# Altium PCB PCB_2.PcbDoc
Units mm, origin at the board's own origin, x right, y up, seen from the top; angles counter-clockwise.
Board outline 33.1 x 39.88 mm, 2 copper layers (Top Layer, Bottom Layer); 74 components, 65 nets, 291 pads, 28 vias.
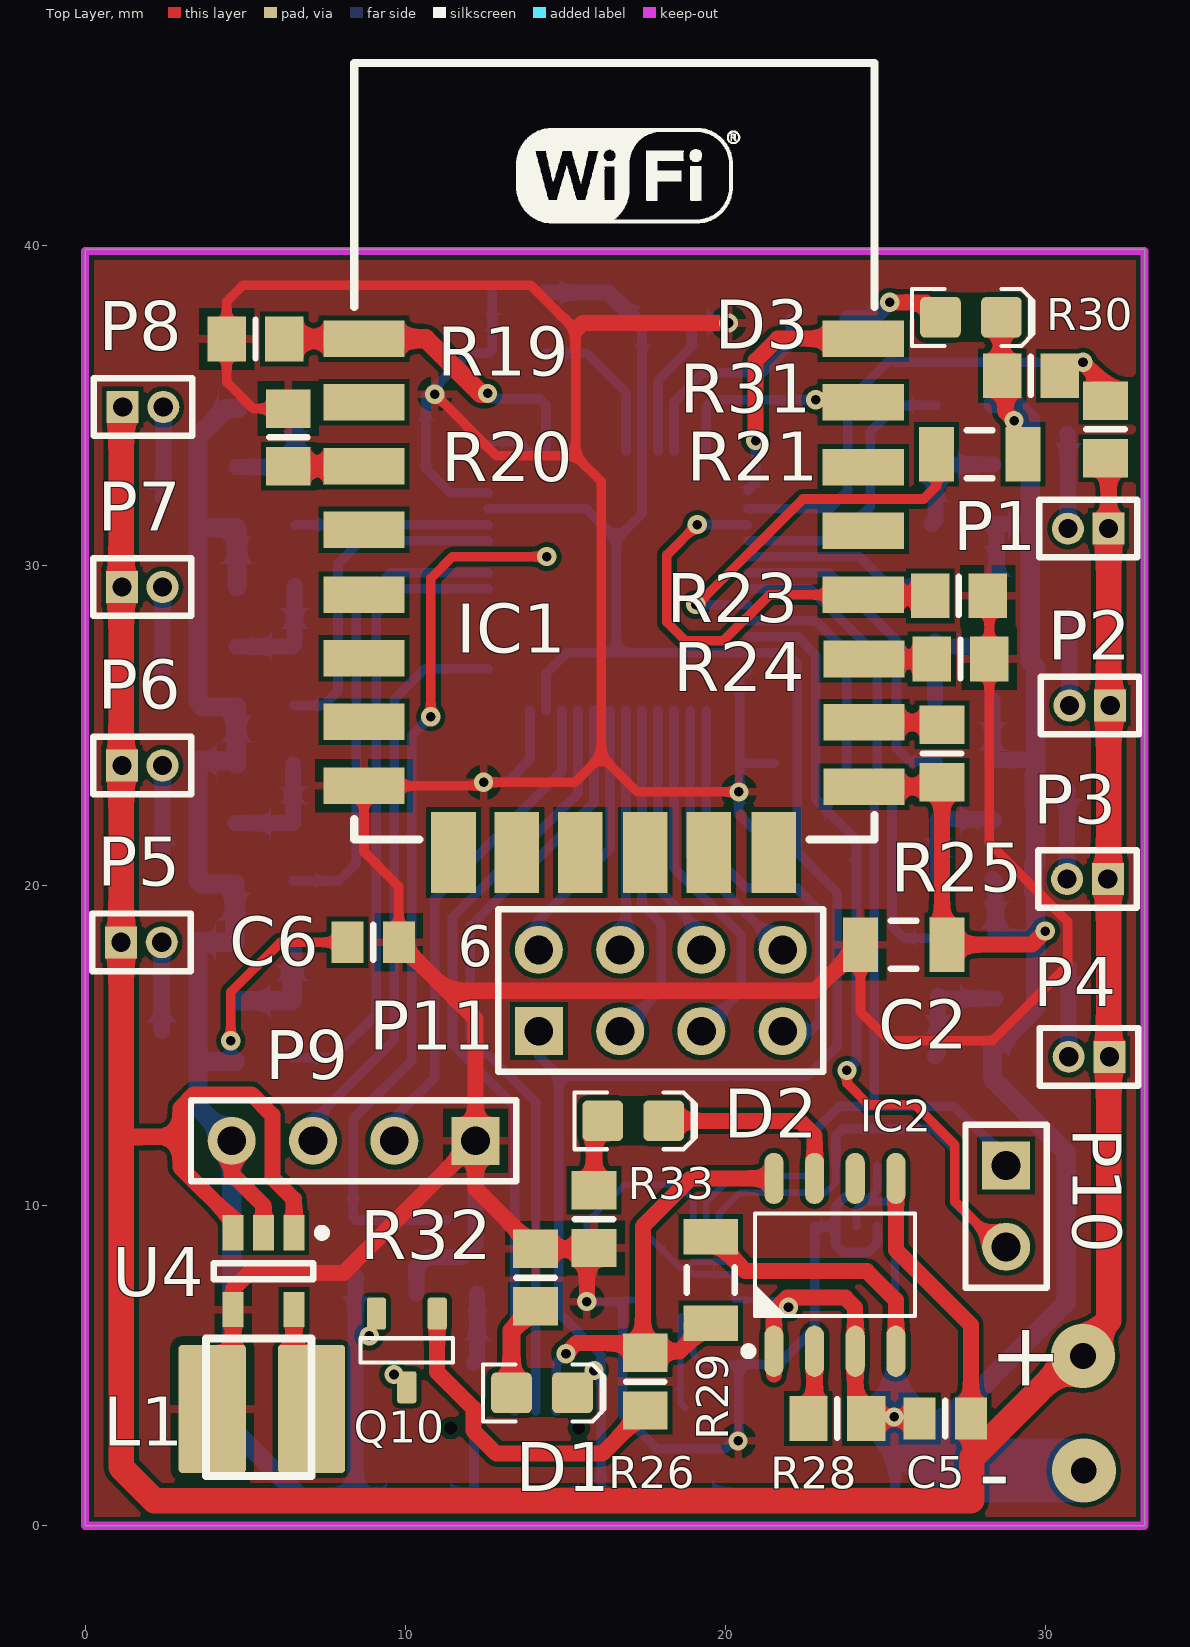
[diagram p0: Top Layer view]
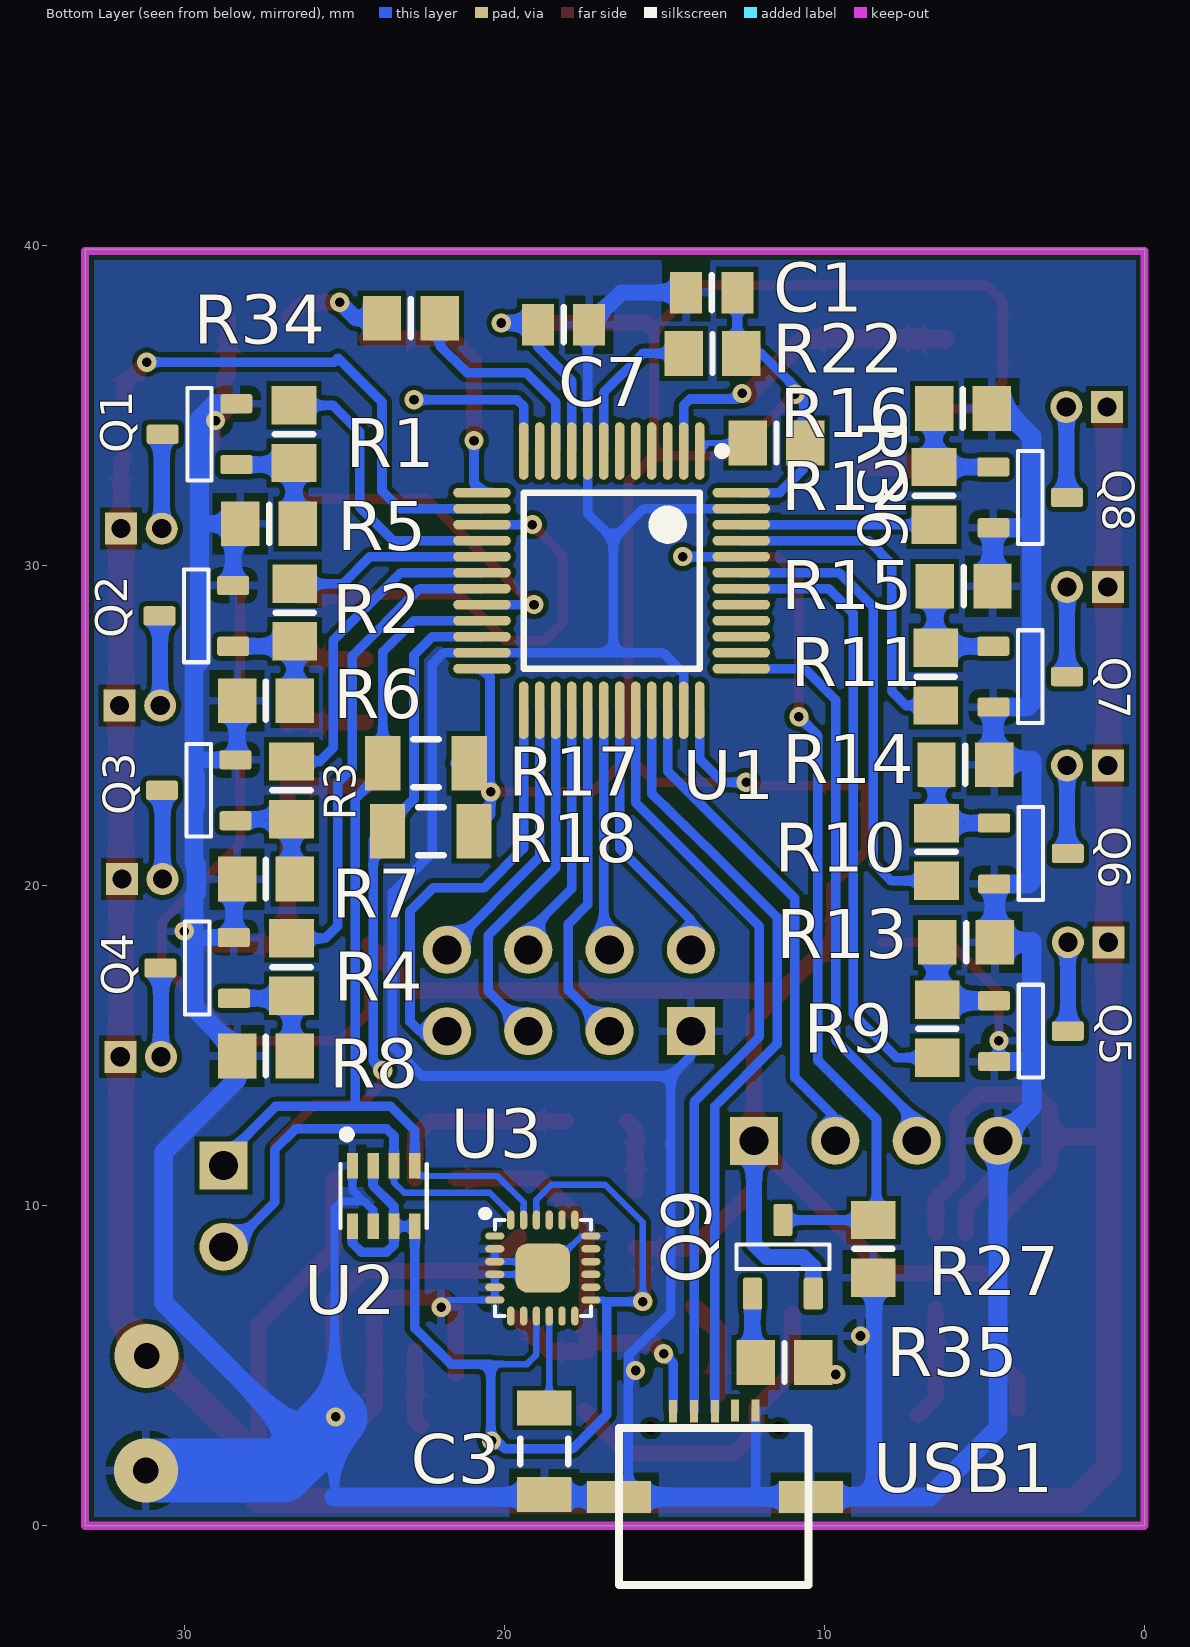
[diagram p1: Bottom Layer view, seen from below]

## Layer stack, top to bottom
Top Solder: solder mask 0.0102, Solder Resist, Dk 3.5
Top Layer: signal copper 0.0356
Dielectric 1: dielectric 0.32, FR-4, Dk 4.8
Bottom Layer: signal copper 0.0356
Bottom Solder: solder mask 0.0102, Solder Resist, Dk 3.5

## Board outline
0,0 33.1,0 33.1,39.875 0,39.875

## Design rules (kind name [scope] priority, off if disabled: settings)
Clearance [All] p1: gap=0.15
PolygonConnect [All] p1: connectstyle=Relief reliefconductorwidth=0.254 reliefentries=4 polygonreliefangle="90 Angle" airgapwidth=0.254
RoutingVias [All] p1: holewidth=0.711 width=1.27 viastyle="Through Hole" minholewidth=0.711 minwidth=1.27 maxholewidth=0.711 maxwidth=1.27
SolderMaskExpansion [All] p1: expansion=0.102
Width [All] p1: maxlimit=2 minlimit=0.2 preferedwidth=0.5
30 further rules are at their usual default settings.

## Classes and differential pairs
component class Potencia: C5 C6 C7 C? D1 D2 D3 IC2 L1 P1 P2 P3 P4 P5 P6 P7 P8 P? Q1 Q2 Q3 Q4 Q5 Q6 Q7 Q8 Q? R1 R2 R3 R4 R5 R6 R7 R8 R9 R10 R11 R12 R13 R14 R15 R16 R28 R29 R32 R33 R34 R? U4
component class Esquematico: C1 C2 C3 C? IC1 P9 P10 P11 Q9 Q10 R17 R18 R19 R20 R21 R22 R23 R24 R25 R26 R27 R30 R31 R35 R36 R? U1 U2 U3 U? USB1

## Components (designator, comment, footprint, x,y, rotation, side; value= is the part's Value field where it differs from the comment)
C1 "Cap" 6-0805_L 13.525,38.525 r180 bottom
C2 "Cap" C1206 25.575,18.15 r180 top
C3 "Cap" C1206 18.75,2.325 r90 bottom
C5 "Cap" 6-0805_L 26.875,3.35 r0 top
C6 "Cap" 6-0805_L 9,18.225 r0 top
C7 "Cap" 6-0805_L 18.15,37.525 r0 bottom
D1 "Diode" LED-0805 14.275,4.15 r0 top
D2 "Diode" LED-0805 17.125,12.65 r0 top
D3 "Diode" LED-0805 27.675,37.75 r0 top
IC1 "ESP8266 ESP-12-E" "ESP8266 ESP-12-E B" 25.3,20.675 r0 top
IC2 "TP4056" SOIC127P600X175-8AN 23.425,8.15 r90 top
L1 "Inductor Iron Dot" "Inductor CD43" 8.075,1.65 r90 top
P1 "MHDR1X2" MHDR1X2 31.975,31.15 r180 top
P2 "MHDR1X2" MHDR1X2 32.025,25.625 r180 top
P3 "MHDR1X2" MHDR1X2 31.95,20.2 r180 top
P4 "MHDR1X2" MHDR1X2 32,14.65 r180 top
P5 "MHDR1X2" MHDR1X2 1.125,18.225 r0 top
P6 "MHDR1X2" MHDR1X2 1.15,23.75 r0 top
P7 "MHDR1X2" MHDR1X2 1.15,29.325 r0 top
P8 "MHDR1X2" MHDR1X2 1.175,34.95 r0 top
P9 "Header 4" HDR1X4 12.2,12.025 r180 top
P10 "Header 2" HDR1X2 28.775,11.25 r270 top
P11 "Header 4X2A" HDR2X4_CEN 14.175,15.45 r0 top
Q1 "AO3406" SOT23-3 29.525,34.1 r0 bottom
Q2 "AO3406" SOT23-3 29.625,28.425 r0 bottom
Q3 "AO3406" SOT23-3 29.55,22.975 r0 bottom
Q4 "AO3406" SOT23-3 29.6,17.425 r0 bottom
Q5 "AO3406" SOT23-3 3.55,15.45 r180 bottom
Q6 "AO3406" SOT23-3 3.55,21 r180 bottom
Q7 "AO3406" SOT23-3 3.575,26.525 r180 bottom
Q8 "AO3406" SOT23-3 3.575,32.125 r180 bottom
Q9 "S8055" SOT23-3 11.3,8.4 r90 bottom
Q10 "S8050" SOT23-3 10.05,5.475 r270 top
R1 "Res3" 6-0805_N 26.575,34.1 r90 bottom
R2 "Res3" 6-0805_N 26.55,28.525 r90 bottom
R3 "Res3" 6-0805_N 26.65,22.975 r90 bottom
R4 "Res3" 6-0805_N 26.65,17.45 r90 bottom
R5 "Res3" 6-0805_N 27.35,31.3 r180 bottom
R6 "Res3" 6-0805_N 27.45,25.775 r180 bottom
R7 "Res3" 6-0805_N 27.45,20.2 r180 bottom
R8 "Res3" 6-0805_N 27.45,14.675 r180 bottom
R9 "Res3" 6-0805_N 6.475,15.525 r270 bottom
R10 "Res3" 6-0805_N 6.5,21.05 r270 bottom
R11 "Res3" 6-0805_N 6.525,26.525 r270 bottom
R12 "Res3" 6-0805_N 6.575,32.175 r270 bottom
R13 "Res3" 6-0805_N 5.575,18.225 r0 bottom
R14 "Res3" 6-0805_N 5.6,23.775 r0 bottom
R15 "Res3" 6-0805_N 5.65,29.35 r0 bottom
R16 "Res3" 6-0805_N 5.675,34.9 r0 bottom
R17 "Res3" C1206 22.45,23.825 r0 bottom
R18 "Res3" C1206 22.3,21.7 r0 bottom
R19 "Res3" 6-0805_N 5.325,37.075 r180 top
R20 "Res3" 6-0805_N 6.35,34 r90 top
R21 "Res3" C1206 27.95,33.475 r0 top
R22 "Res3" 6-0805_N 13.5,36.625 r180 bottom
R23 "Res3" 6-0805_N 27.3,29.05 r0 top
R24 "Res3" 6-0805_N 27.35,27.075 r180 top
R25 "Res3" 6-0805_N 26.775,24.125 r90 top
R26 "Res3" 6-0805_N 17.5,4.5 r270 top
R27 "Res3" 6-0805_N 8.475,8.65 r270 bottom
R28 "Res3" 6-0805_N 23.5,3.35 r0 top
R29 "Res3" C1206 19.55,7.675 r90 top
R30 "Res3" 6-0805_N 31.875,34.25 r90 top
R31 "Res3" 6-0805_N 29.55,35.925 r180 top
R32 "Res3" 6-0805_N 14.075,7.75 r90 top
R33 "Res3" 6-0805_N 15.9,9.575 r270 top
R34 "Res3" 6-0805_N 22.925,37.725 r180 bottom
R35 "Res3" 6-0805_N 11.25,5.1 r180 bottom
R36 "Res3" 6-0805_N 11.5,33.825 r180 bottom
U1 "STM32F103C8T6" LQFP48_N 16.65,29.525 r270 bottom
U2 "BMP280" LGA-8_BMP280(Primary) 23.775,10.3 r90 bottom
U3 "GYRO/ACCEL/COMPASS/9-AXIS" QFN-24/3MM 18.8,8.05 r180 bottom
U4 "LM3671MF-3.3/NOPB" MF05A_N 5.575,7.95 r270 top
USB1 "Micro_USB" "Micro USB" 15.425,3.05 r180 bottom

## Footprints (in the part's own frame and the unit in brackets; to place one, negate y for a bottom-side part, rotate by r counter-clockwise, add the part's x,y. Pads: shape width x height; smd on the part's side, far side on the other; paste and mask are expansions set on the pad)
6-0805_L [mm] "Chip Resistor, Body 2.0x1.2mm, IPC High Density"
  rect 1x1.3 smd: 1(-0.8,0) 2(0.8,0)
  silkscreen extent 0,-0.55 0,0.55, body extent -1.07,-0.7 1.07,0.7, height 0.7
6-0805_N [mm] "Chip Resistor, Body 2.0x1.2mm, IPC Medium Density"
  rect 1.2x1.4 smd: 1(-0.9,0) 2(0.9,0)
  silkscreen extent 0,-0.6 0,0.6, body extent -1.07,-0.7 1.07,0.7, height 0.7
C1206 [mm] "Chip Capacitor, Body 3.2x1.6mm, IPC High Density"
  rect 1.1x1.7 smd: 1(-1.35,0) 2(1.35,0)
  silkscreen extent -0.4,-0.75 0.4,0.75, body extent -1.7,-0.9 1.7,0.9, height 1.3
"ESP8266 ESP-12-E B" [mil] "ESP8266 ESP-12-E"
  rect 100x45 smd: 1(-653,646) 2(-653,568) 3(-653,489) 4(-653,411) 5(-653,331) 6(-653,253) 7(-653,175) 8(-653,96) 15(-38,95) 16(-38,174) 17(-38,252) 18(-39,331) 19(-39,410) 20(-39,488) 21(-39,568) 22(-39,646)
  rect 55x100 smd: 9(-543,14) 10(-465,14) 11(-387,14) 12(-307,14) 13(-229,14) 14(-149,14)
  silkscreen extent -665,30 -25,985
HDR1X2 [mm] "Connector; Header; 2 Position"
  rect 1.5x1.5 hole 0.9: 1(0,0)
  round 1.5 hole 0.9: 2(2.54,0)
  silkscreen extent -1.27,-1.27 3.81,1.27
HDR1X4 [mm] "Connector; Header; 4 Position"
  rect 1.5x1.5 hole 0.9: 1(0,0)
  round 1.5 hole 0.9: 2(2.54,0) 3(5.08,0) 4(7.62,0)
  silkscreen extent -1.27,-1.27 8.89,1.27
HDR2X4_CEN [mm] "Connector; Header; 4x2 Position"
  rect 1.5x1.5 hole 0.9: 1(0,0)
  round 1.5 hole 0.9: 2(2.54,0) 3(5.08,0) 4(7.62,0) 5(0,2.54) 6(2.54,2.54) 7(5.08,2.54) 8(7.62,2.54)
  silkscreen extent -1.27,-1.27 8.89,3.81
"Inductor CD43" [mm] "4.5mm * 4mm"
  rrect10% 4x2.1 smd: 1(2,1) 2(2,4.1)
  silkscreen extent -0.1,1 4.2,4.3
LED-0805 [mil]
  round 20 on Mech15: 0(0,0)
  rrect25% 50x50 smd: 1(-37.5,0) 2(37.5,0)
  Top Layer pour cut-out: -15,30 15,30 15,-30 -15,-30
  silkscreen extent -72,-35 77,35, body extent -39,-25 39,25, height 31
LGA-8_BMP280(Primary) [mm]
  rect 0.8x0.35 smd paste-25.4 mask-25.4: 1(0.95,0.975) 2(0.95,0.325) 3(0.95,-0.325) 4(0.95,-0.975) 5(-0.95,-0.975) 6(-0.95,-0.325) 7(-0.95,0.325) 8(-0.95,0.975)
  silkscreen extent -1,-1.35 2.02,1.35
LQFP48_N [mm] "Thin QFP, 48-Leads, Body 7x7mm, Pitch 0.5mm, IPC Medium Density"
  oval 1.8x0.3 smd: 1(-4.05,2.75) 2(-4.05,2.25) 3(-4.05,1.75) 4(-4.05,1.25) 5(-4.05,0.75) 6(-4.05,0.25) 7(-4.05,-0.25) 8(-4.05,-0.75) 9(-4.05,-1.25) 10(-4.05,-1.75) 11(-4.05,-2.25) 12(-4.05,-2.75) 25(4.05,-2.75) 26(4.05,-2.25) 27(4.05,-1.75) 28(4.05,-1.25) 29(4.05,-0.75) 30(4.05,-0.25) 31(4.05,0.25) 32(4.05,0.75) 33(4.05,1.25) 34(4.05,1.75) 35(4.05,2.25) 36(4.05,2.75)
  oval 0.3x1.8 smd: 13(-2.75,-4.05) 14(-2.25,-4.05) 15(-1.75,-4.05) 16(-1.25,-4.05) 17(-0.75,-4.05) 18(-0.25,-4.05) 19(0.25,-4.05) 20(0.75,-4.05) 21(1.25,-4.05) 22(1.75,-4.05) 23(2.25,-4.05) 24(2.75,-4.05) 37(2.75,4.05) 38(2.25,4.05) 39(1.75,4.05) 40(1.25,4.05) 41(0.75,4.05) 42(0.25,4.05) 43(-0.25,4.05) 44(-0.75,4.05) 45(-1.25,4.05) 46(-1.75,4.05) 47(-2.25,4.05) 48(-2.75,4.05)
  silkscreen extent -4.17,-2.75 2.75,3.57, body extent -3.5,-3.5 3.5,3.5, height 1.6
MF05A_N [mm] "SOT23, 5-Leads, Body 2.9x1.6mm, Pitch 0.95mm, Lead Span 2.8mm, IPC Medium Density"
  rect 1.1x0.65 smd: 1(-1.2,0.95) 2(-1.2,0) 3(-1.2,-0.95) 4(1.2,-0.95) 5(1.2,0.95)
  silkscreen extent -1.32,-1.55 0.25,1.95, body extent -0.9,-1.55 0.9,1.55, height 1.19
MHDR1X2 [mm] "Connector; Header; 2 Position"
  rect 1x1 hole 0.6: 1(0,0)
  round 1 hole 0.6: 2(1.27,0)
  silkscreen extent -0.9,-0.9 2.17,0.9
"Micro USB" [mm]
  round 0 hole 0.4: 0(0,0) 0(4,0)
  rect 0.25x0.7 smd: 1(0.7,0.525) 2(1.35,0.525) 3(2,0.525) 4(2.625,0.55) 5(3.275,0.55)
  rect 2x1 smd: 6(-1,-2.15) 6(5,-2.15)
  silkscreen extent -1,-4.9 4.92,0
QFN-24/3MM [mm]
  rrect50% 1.7x1.54 smd: 0(0,0)
  rrect100% 0.6x0.23 smd: 1(-1.5,1) 2(-1.5,0.6) 3(-1.5,0.2) 4(-1.5,-0.2) 5(-1.5,-0.6) 6(-1.5,-1) 13(1.5,-1) 14(1.5,-0.6) 15(1.5,-0.2) 16(1.5,0.2) 17(1.5,0.6) 18(1.5,1)
  rrect100% 0.23x0.6 smd: 7(-1,-1.5) 8(-0.6,-1.5) 9(-0.2,-1.5) 10(0.2,-1.5) 11(0.6,-1.5) 12(1,-1.5) 19(1,1.5) 20(0.6,1.5) 21(0.2,1.5) 22(-0.2,1.5) 23(-0.6,1.5) 24(-1,1.5)
  silkscreen extent -2,-1.5 1.5,1.9
SOIC127P600X175-8AN [mm] "SOIC, 8-Leads, Body 4.9x3.9mm, Pitch 1.27mm, IPC Medium Density"
  round 1 on Mech15: 0(0,0)
  oval 1.6x0.6 smd: 1(-2.7,1.905) 2(-2.7,0.635) 3(-2.7,-0.635) 4(-2.7,-1.905) 5(2.7,-1.905) 6(2.7,-0.635) 7(2.7,0.635) 8(2.7,1.905)
  silkscreen extent -2.82,-2.5 1.6,2.82, body extent -3,-2.45 3,2.45, height 1.75
SOT23-3 [mm] "SOT23, 3 pin"
  round 0.5 on Mech15: 0(0,0)
  rrect25% 1x0.6 smd: 1(-1.15,0.95) 2(-1.15,-0.95) 3(1.15,0)
  silkscreen extent -0.38,-1.45 0.38,1.45, body extent -1.4,-1.45 1.4,1.45, height 1.29

## Part data
C1 C2 C3 C5 C6 C7: "Capacitor"
D1 D2 D3: "Default Diode"
L1: "Magnetic-Core Inductor with Winding Polarity Marking"
P1 P2 P3 P4 P5 P6 P7 P8 P10: "Header, 2-Pin"
P9: "Header, 4-Pin"
P11: "Header, 4-Pin, Dual row"
Q1 Q2 Q3 Q4 Q5 Q6 Q7 Q8: library part MOSFET-N, "N-Channel MOSFET"
Q9: "PNP SMD General Purpose Amplifier"
Q10: "NPN SMD General Purpose Amplifier"
R1 R2 R3 R4 R5 R6 R7 R8 R9 R10 R11 R12 R13 R14 R15 R16 R17 R18 R19 R20 R21 R22 R23 R24 R25 R26 R27 R28 R29 R30 R31 R32 R33 R34 R35 R36: "Resistor"
U1: "STM32 ARM-based 32-bit MCU with 64 Kbytes Flash, 48-pin LQFP, Industrial Temperature"
U2: "Barometro"
U3: library part MPU-9250
U4: "2MHz, 600mA Step-Down DC-DC Converter, 5-pin SOT-23, Pb-Free"

## Via types
v1: diameter 0.6, hole 0.3, Top Layer to Bottom Layer, 25 vias
v2: diameter 2, hole 0.8, Top Layer to Bottom Layer, 2 vias
v3: diameter 0.6, hole 0.3, Top Layer to Bottom Layer, tented both sides, 1 vias

## Nets (pads, with @x,y where several pads share a name; then routed paths per layer and width w, separated by ;. In a path a pad name is that pad's centre, name@x,y a point inside that pad or via, vN(x,y) a via of type N, cw(c..) or ccw(c..) an arc to the next point about the centre after c; other vN are vias at no path point)
ADC: R30.2 R31.1 U1.14 | length 15.6
  Top Layer w0.5: v1(31.175,36.35) 31.875,35.65 R30.2
  Bottom Layer w0.3: U1.14 23.275,31.775 23.825,32.325 23.825,35.1 25.2,36.475 25.325,36.35 v1(31.175,36.35)
BOOT_0: Q9.3 R27.1 U1.44 | length 29.7
  Top Layer w0.3: v1(10.8,25.275) 10.8,29.6 11.475,30.275 v1(14.425,30.275)
  Bottom Layer w0.3: v1(10.8,25.275) 10.208,24.683 10.208,14.533 8.375,12.7 8.375,9.65 R27.1 Q9.3 ; U1.44 v1(14.425,30.275)
BOOT_ESP: IC1.18 R23.1 U1.15 | length 14.1
  Top Layer w0.3: v1(19.125,31.275) 18.175,30.325 18.175,28.225 18.75,27.65 19.95,27.65 21.382,29.082 IC1.18
  Top Layer w0.5: IC1.18 24.342,29.05 R23.1
  Bottom Layer w0.3: v1@19.1,31.25 v1(19.125,31.275) U1.15
CHARGE: D2.2 IC2.7 | length 6.2
  Top Layer w0.5: D2.2 22.325,12.65 22.79,12.185 IC2.7
GND: C1.1 C2.1 C3.1 C5.1 C6.1 C7.1 D1.2 D3.2 IC1.15 IC2.1 IC2.3 P9.4 P11.1 Q1.2 Q2.2 Q3.2 Q4.2 Q5.2 Q6.2 Q7.2 Q8.2 Q10.2 R5.1 R6.1 R7.1 R8.1 R13.1 R14.1 R15.1 R16.1 R21.2 R25.1 R27.2 R28.2 R31.2 U1.8 U1.23 U1.35 U1.47 U2.1 U2.7 U3.0 U3.2 U3.3 U3.4 U3.5 U3.6 U3.18 U4.2 USB1.5 USB1.6 | length 247.1
  Top Layer w0.3: v1(4.55,15.15) 4.55,16.675 6.1,18.225 C6.1 ; v1(29.025,34.525) 29.025,33.75 R21.2
  Top Layer w0.5: P9.4 4.58,10.995 5.575,10 U4.2 ; IC2.1@21.52,4.72 IC2.1 21.52,6.72 21.925,7.125 23.75,7.125 24.06,6.815 IC2.3 24.06,3.715 24.425,3.35 C5.1 ; IC1.15 26.638,23.088 R25.1 26.775,18.3 C2.1 29.575,18.15 v1(30,18.575) ; D3.2 28.627,35.947 R31.2 ; R31.2@28.75,35.925 28.75,34.8 v1(29.025,34.525)
  Bottom Layer w0.2: U3.18 17.599,9.05 17.634,9.015 ; 17.651,9 18.601,8.05 U3.0 ; U3.2 U3.3 19,8.25 U3.0 ; v1(21.975,6.825) 21.75,7.05 U3.6 U3.5 U3.4 19,7.85 U3.0
  Bottom Layer w0.256: 14.8,9.325 14.825,9.3 ; 14.8,11.975 14.85,11.925 ; U2.7 24.1,9.868 24.364,10.132 24.395,10.132 ; U2.1 24.75,10.487 24.395,10.132 ; 25.325,0.9 25.307,0.918 25.307,3.368 25.307,9.908 25.083,10.132 24.395,10.132
  Bottom Layer w0.3: v1(4.55,15.15) 4.55,14.65 Q5.2 ; USB1.5 12.15,0.925 12.175,0.9 ; U1.47 15.65,31.775 16.6,30.825 ; P11.1 14.175,14.675 14.8,14.05 ; U1.35 14.4,26.625 15.05,27.275 16.6,27.275 ; USB1.6@16.425,0.9 16.125,1.2 16.125,5.325 14.8,6.65 14.8,9.325 14.8,11.975 14.8,14.05 ; C7.1 17.4,37.475 U1.8 17.4,31.625 16.6,30.825 ; 14.8,14.05 22.567,14.05 23.504,14.987 23.504,19.775 22.25,21.029 22.25,26.925 21.9,27.275 U1.23 16.6,27.275 ; 16.6,27.275 16.6,30.825
  Bottom Layer w0.5: 8.45,0.9 8.45,7.725 R27.2 ; C1.1 16.35,38.525 C7.1 ; R7.1 28.45,20.1 Q4.2 29.625,18.375 ; R6.1 28.35,23.975 Q3.2 29.675,23.925 29.7,23.95 ; Q2.2 28.475,31.075 R5.1 29.429,31.3 29.529,31.2
  Bottom Layer w0.6: Q5.2 3.55,14.5 3.525,14.525 ; R15.1 4.75,31.15 Q8.2 3.6,31.175 3.525,31.25 ; R16.1 4.4,34.9 3.525,34.025 3.525,31.25 ; 9.1,0.925 9.075,0.9 ; 25.325,0.9 16.425,0.9 12.175,0.9 10.425,0.9 9.075,0.9 ; 26.176,2.499 30.65,6.973 30.65,11.658 28.35,13.958 R8.1 28.35,15.025 28.54,15.025 29.7,16.185 29.7,16.935 29.696,16.939 29.696,17.911 29.7,17.915 29.7,19.689 29.626,19.763 29.626,20.637 29.7,20.711 29.7,22.435 29.646,22.489 29.646,23.461 29.7,23.515 29.7,23.95 29.7,26.818 29.529,26.989 29.529,31.2 29.529,34.571 29.05,35.05 Q1.2 ; 3.525,14.525 3.525,13.08 P9.4 4.58,3.045 6.725,0.9 8.45,0.9 9.075,0.9 ; 3.525,14.525 3.525,18.25 3.55,18.225 R13.1 4.675,20.025 Q6.2 3.625,20.05 3.525,20.15 3.525,23.9 4.625,23.9 4.725,23.8 Q7.2 3.675,25.575 3.525,25.725 3.525,31.25
  Bottom Layer w2: v1(25.275,3.4) 25.307,3.368 26.176,2.499 26.95,1.725 v2(31.2,1.725)
  other v1: 15.9,4.85 8.875,5.925
GPIO0: P11.4 U1.25 | length 13.4
  Bottom Layer w0.3: U1.25 19.4,22.75 19.4,21.168 20.643,19.925 22.225,19.925 22.95,19.2 22.95,15.75 22.65,15.45 P11.4
GPIO1: P11.8 U1.26 | length 8.7
  Bottom Layer w0.3: U1.26 18.9,20.885 P11.8
GPIO2: P11.3 U1.27 | length 11.4
  Bottom Layer w0.3: U1.27 18.4,20.55 20.5,18.45 20.5,16.695 P11.3
GPIO3: P11.7 U1.28 | length 8
  Bottom Layer w0.3: U1.28 17.9,19.9 19.255,18.545 P11.7
GPIO4: P11.2 U1.29 | length 10.8
  Bottom Layer w0.3: P11.2 18,16.735 18,18.804 17.4,19.404 17.4,20.475 U1.29
GPIO5: P11.6 U1.30 | length 7.6
  Bottom Layer w0.3: P11.6 16.9,18.175 U1.30
GPIO6: P11.5 U1.31 | length 8.4
  Bottom Layer w0.3: P11.5 14.175,18.925 16.4,21.15 U1.31
"MOTOR 0": P1.2 Q1.3 | length 3
  Bottom Layer w0.5: Q1.3 30.705,34.07 P1.2
"MOTOR 1": P2.2 Q2.3 | length 2.8
  Bottom Layer w0.5: P2.2 30.755,28.405 Q2.3
"MOTOR 2": P3.2 Q3.3 | length 2.8
  Bottom Layer w0.5: P3.2 30.68,22.955 Q3.3
"MOTOR 3": P4.2 Q4.3 | length 2.8
  Bottom Layer w0.5: P4.2 30.73,17.405 Q4.3
"MOTOR 4": P5.2 Q5.3 | length 2.8
  Bottom Layer w0.5: P5.2 2.395,15.455 Q5.3
"MOTOR 5": P6.2 Q6.3 | length 2.8
  Bottom Layer w0.5: Q6.3 2.42,21.02 P6.2
"MOTOR 6": P7.2 Q7.3 | length 2.8
  Bottom Layer w0.5: P7.2 2.42,26.53 Q7.3
"MOTOR 7": P8.2 Q8.3 | length 2.8
  Bottom Layer w0.5: Q8.3 2.445,32.145 P8.2
NetC3_2: C3.2 U3.10 | length 2.9
  Bottom Layer w0.2: U3.10 18.6,3.825 C3.2
NetD1_1: D1.1 R32.1 | length 3
  Top Layer w0.56: D1.1 13.323,6.098 R32.1
NetD2_1: D2.1 R33.1 | length 2.3
  Top Layer w0.5: R33.1 15.9,12.378 D2.1
NetD3_1: D3.1 R34.1 | length 3.3
  Top Layer w0.5: v1(25.141,38.222) 26.251,38.222 D3.1
  Bottom Layer w0.5: R34.1 24.644,37.725 v1(25.141,38.222)
NetIC1_3: IC1.3 R20.1 | length 2.4
  Top Layer w0.6: R20.1 8.709,33.1 IC1.3
NetIC1_16: IC1.16 R25.2 | length 2.5
  Top Layer w0.5: IC1.16 26.705,25.095 R25.2
NetIC1_17: IC1.17 R24.2 | length 2.1
  Top Layer w0.5: IC1.17 R24.2@26.449,27.076
NetIC2_2: IC2.2 R28.1 | length 2.4
  Top Layer w0.5: R28.1@22.6,3.125 22.79,3.315 IC2.2
NetIC2_4: IC2.4 R29.2 | length 8.2
  Top Layer w0.5: R29.2 20.625,7.95 24.425,7.95 25.33,7.045 IC2.4
NetL1_1: L1.1 U4.5 | length 3.5
  Top Layer w0.5: U4.5 6.525,4 L1.1@7.075,3.45
NetQ1_2: Q1.1 R1.1 R5.2 | length 3.8
  Bottom Layer w0.5: R5.2 26.575,31.425 R1.1 26.625,33.15 Q1.1
NetQ2_2: Q2.1 R2.1 R6.2 | length 3.8
  Bottom Layer w0.5: R6.2 R2.1 26.7,27.475 Q2.1
NetQ3_2: Q3.1 R3.1 R7.2 | length 3.7
  Bottom Layer w0.5: R7.2 26.65,20.3 R3.1 28.35,22.075 Q3.1
NetQ4_2: Q4.1 R4.1 R8.2 | length 3.7
  Bottom Layer w0.5: R8.2 26.65,14.775 R4.1 26.725,16.475 Q4.1
NetQ5_2: Q5.1 R9.1 R13.2 | length 3.6
  Bottom Layer w0.6: Q5.1 6.45,16.4 R9.1 R13.2
NetQ6_2: Q6.1 R10.1 R14.2 | length 3.6
  Bottom Layer w0.5: Q6.1 R10.1 R14.2
NetQ7_2: Q7.1 R11.1 R15.2 | length 3.7
  Bottom Layer w0.5: Q7.1 6.475,27.475 6.55,27.55 R15.2
NetQ8_2: Q8.1 R12.1 R16.2 | length 3.7
  Bottom Layer w0.5: Q8.1 R12.1 R16.2
NetQ9_1: Q9.1 R35.1 | length 2.2
  Bottom Layer w0.5: R35.1 12.25,5.2 Q9.1
NetQ10_1: Q10.1 R26.2 | length 10.4
  Top Layer w0.5: Q10.1 11,4.8 12.129,3.671 12.129,2.971 12.85,2.25 16.15,2.25 R26.2
NetQ10_3: Q10.3 R35.2
  other v1: 9.65,4.725
NetR21_1: R21.1 U1.20 | length 11.7
  Top Layer w0.3: v1(19.075,28.775) 19.125,28.775 22.425,32.075 26.2,32.075 26.6,32.475 R21.1
  Bottom Layer w0.3: v1(19.075,28.775) U1.20
NetR36_1: R36.1 U1.1 | length 1.6
  Bottom Layer w0.2: R36.1 13.65,33.825 U1.1
NRST: R22.1 U1.7 | length 4.8
  Bottom Layer w0.3: R22.1 15.675,36.625 16.9,35.4 U1.7
PWM0: R1.2 U1.16 | length 9
  Bottom Layer w0.3: U1.16 23.475,30.775 24.525,31.825 24.525,34.175 25.35,35 R1.2
PWM1: R2.2 U1.17 | length 6.2
  Bottom Layer w0.3: U1.17 24.2,30.275 25.05,29.425 R2.2
PWM2: R3.2 U1.18 | length 10.4
  Bottom Layer w0.3: U1.18 23.225,29.775 25.35,27.65 25.35,24.3 25.775,23.875 R3.2
PWM3: R4.2 U1.19 | length 15.1
  Bottom Layer w0.3: U1.19 22.65,29.275 24.754,27.171 24.754,23.654 25.208,23.2 25.208,18.742 25.6,18.35 R4.2
PWM4: R9.2 U1.42 | length 19.5
  Bottom Layer w0.3: R9.2 7.75,14.625 9.1,15.975 9.1,28.5 9.875,29.275 U1.42
PWM5: R10.2 U1.43 | length 14.8
  Bottom Layer w0.3: R10.2 7.925,20.15 8.475,20.7 8.475,28.7 9.55,29.775 U1.43
PWM6: R11.2 U1.45 | length 10.5
  Bottom Layer w0.3: R11.2 7.45,25.625 7.9,26.075 7.9,30.05 8.625,30.775 U1.45
PWM7: R12.2 U1.46 | length 6
  Bottom Layer w0.3: R12.2 U1.46
RST: IC1.1 R19.1 U1.2 | length 10.5
  Top Layer w0.6: R19.1 8.705,37.075 IC1.1 10.642,37.083 12.35,35.375 v1(12.575,35.375)
  Bottom Layer w0.3: v1(12.575,35.375) 12.575,35.35 12.725,35.2 14.2,35.2 14.4,35 U1.2
RX: IC1.22 U1.13 | length 7.8
  Top Layer w0.5: v3(20.95,33.9) 20.95,36.4 21.633,37.083 IC1.22
  Bottom Layer w0.3: U1.13@20.7,32.329 20.95,32.579 v3(20.95,33.9)
SCL: P10.1 R17.2 U1.21 U2.4 U3.23 | length 30.9
  Bottom Layer w0.2: U3.23 19.4,10.1 20.225,10.925 22.7,10.925 22.8,11.025 U2.4
  Bottom Layer w0.3: U1.21 22.825,28.275 23.8,27.3 R17.2 23.8,23.575 24.654,22.721 24.654,13.104 24.65,13.1 ; U2.4 22.8,12.35 23.55,13.1 24.65,13.1 ; P10.1@28.9,11.35 27.15,13.1 24.65,13.1
SDA: P10.2 R18.2 U1.22 U2.3 U3.24 | length 38.1
  Top Layer w0.3: v1(23.8,14.225) 23.8,13.825 24.475,13.15 25.925,13.15 27.175,11.9 27.175,10.125 28.59,8.71 P10.2
  Bottom Layer w0.2: U3.24 19.8,9.742 20.458,10.4 23.131,10.4 23.45,10.719 U2.3
  Bottom Layer w0.3: U1.22 22.25,27.775 22.825,27.2 22.825,22.7 24.1,21.425 24.1,14.525 v1(23.8,14.225) ; U2.3 23.45,12.175 23.675,12.4 26.525,12.4 27.175,11.75 27.175,10.1 28.565,8.71 P10.2
STATE: R34.2 U1.10 | length 6.7
  Bottom Layer w0.3: U1.10 18.4,35.1 19.325,36.025 21.175,36.025 22.025,36.875 R34.2
SWCLK: P9.3 U1.37 | length 18.3
  Bottom Layer w0.3: P9.3@7.195,11.825 7.195,12.72 9.654,15.179 9.654,25.804 10.625,26.775 U1.37
SWDIO: P9.2 U1.34 | length 15.8
  Bottom Layer w0.3: P9.2@9.735,11.825 9.735,12.81 10.925,14 10.925,19.6 14.9,23.575 U1.34
TX: IC1.21 U1.12 | length 4.9
  Bottom Layer w0.3: U1.12 19.4,34.975 19.6,35.175 v1(22.825,35.175)
  other v1: 22.825,35.175
USB_DM: U1.32 USB1.2 | length 24.3
  Bottom Layer w0.3: USB1.2 14.075,5.721 14.075,13.233 12.033,15.275 12.033,18.722 15.9,22.589 U1.32
USB_DP: U1.33 USB1.3 | length 24.4
  Bottom Layer w0.3: USB1.3 13.429,3.575 13.429,13.096 11.479,15.046 11.479,19.008 13.429,20.958 15.4,22.875 U1.33
VCC: C1.2 C2.2 C6.2 C7.2 IC1.8 L1.2 P9.1 Q9.2 R17.1 R18.1 R19.2 R20.2 R22.2 R23.2 R24.1 R32.2 R33.2 R36.2 U1.9 U1.24 U1.36 U1.48 U2.2 U2.5 U2.6 U2.8 U3.9 U3.13 U3.22 U4.4 | length 186
  Top Layer w0.3: R20.2 5.25,34.9 4.425,35.725 R19.2 4.425,38.25 4.925,38.75 13.925,38.75 15.325,37.35 15.325,33.425 ; C6.2 9.8,19.975 8.714,21.061 IC1.8 12.338,23.113 v1(12.45,23.225) 15.3,23.225 16.125,24.05 ; v1(10.925,35.35) 12.85,33.425 15.325,33.425 ; v1(20.425,22.925) 17.25,22.925 16.125,24.05 ; C2.2 24.225,16.05 25.125,15.15 28.341,15.15 30.704,17.513 30.704,18.867 28.25,21.321 R24.1 28.25,29 R23.2 ; 15.325,33.425 16.125,32.625 16.125,24.05
  Top Layer w0.5: L1.2 3.975,4.55 4.625,5.2 U4.4 4.625,7.4 5.125,7.9 8.075,7.9 P9.1 ; C6.2 11.312,16.713 ; 15.325,37.35 15.55,37.575 v1(20.1,37.575) ; v1(15.675,7) 15.675,8.45 R33.2@15.875,8.65 ; R33.2 R33.2@15.875,8.65 ; C2.2 22.788,16.713 11.312,16.713 ; 11.312,16.713 12.2,15.825 P9.1 ; P9.1 12.2,10.525 R32.2 R33.2@15.875,8.65
  Bottom Layer w0.2: v1(15.675,7) 15.675,9.475 16.85,10.65 18.534,10.65 19,10.184 U3.22 ; 16.8,7 16.85,7.05 U3.13 ; U3.9 19,5.343 19.292,5.05 20.425,5.05
  Bottom Layer w0.3: v1(12.45,23.225) 13.175,23.225 13.9,23.95 U1.36 ; U1.48 11.4,32.275 10.644,33.031 10.644,35.294 11.975,36.625 R22.2 12.725,36.75 C1.2 ; v1(15.675,7) 16.8,7 16.8,3.475 17.875,2.4 19.975,2.4 20.425,2.85 20.425,5.05 21.675,5.05 22.8,6.175 U2.5 U2.6 ; U1.9 17.9,35.775 18.95,36.825 C7.2 ; U1.24 20.45,26.525 20.45,23.9 ; R18.1 20.425,22.225 v1(20.425,22.925) 20.45,22.95 20.45,23.9 ; R17.1@21.55,23.825 20.525,23.825 20.45,23.9 ; U2.2 24.1,10.62 23.45,9.97 U2.6 ; U2.8 24.75,8.825 24.471,8.546 23.679,8.546 23.45,8.775 U2.6
  Bottom Layer w0.5: Q9.2 10.35,8.075 10.675,8.4 11.8,8.4 12.2,8.8 P9.1 ; C7.2 19,37.575 v1(20.1,37.575)
  other v1: 20.4,2.65
VCC_BAT: C5.2 IC2.5 P1.1 P2.1 P3.1 P4.1 P5.1 P6.1 P7.1 P8.1 R30.1 U4.1 U4.3 | length 119.3
  Top Layer w0.5: 1.125,12.225 1.125,12.15 2.975,12.15 ; U4.3 4.625,9.55 2.975,11.2 2.975,12.15 ; U4.1 6.525,10.2 5.85,10.875 5.85,12.825 5.2,13.475 3.4,13.475 2.975,13.05 2.975,12.15 ; IC2.5 25.33,8.62 27.675,6.275 C5.2 27.675,0.821 27.7,0.796 ; R30.1 31.975,33.25 P1.1
  Top Layer w0.8: 1.125,12.15 1.125,1.825 2.168,0.782 27.686,0.782 27.7,0.796 27.7,2.125 31.975,6.4 P1.1 ; 1.125,12.225 P5.1 1.125,34.9 P8.1
  other v2: 31.175,5.3
VCC_USB: IC2.8 R26.1 R29.1 USB1.1 | length 15.4
  Top Layer w0.5: v1(15.025,5.375) 15.35,5.7 17.425,5.7 17.425,9.35 18.925,10.85 IC2.8 ; R26.1@17.425,5.45 18.575,5.45 R29.1@19.6,6.475
  Bottom Layer w0.3: USB1.1 14.725,5.075 v1(15.025,5.375)
pads on no net: D1.0 D2.0 D3.0 IC1.2 IC1.4 IC1.5 IC1.6 IC1.7 IC1.9 IC1.10 IC1.11 IC1.12 IC1.13 IC1.14 IC1.19 IC1.20 IC2.0 IC2.6 Q1.0 Q2.0 Q3.0 Q4.0 Q5.0 Q6.0 Q7.0 Q8.0 Q9.0 Q10.0 U1.3 U1.4 U1.5 U1.6 U1.11 U1.38 U1.39 U1.40 U1.41 U3.1 U3.7 U3.8 U3.11 U3.12 U3.14 U3.15 U3.16 U3.17 U3.19 U3.20 U3.21 USB1.0 USB1.4

## Polygon pours and split planes (outlines as drawn)
VCC on Top Layer "PLANO_3V3" (solid, pour order 6): 0,0 33.1,0 33.1,39.825 0,39.825
GND on Bottom Layer "PLANO_GND" (solid, pour order 8): 0,39.825 33.1,39.825 33.1,0 0,0

## Keep-outs
Keep-Out Layer:
  lines w0.256: 0,0 0,39.825 33.1,39.825 33.1,0 0,0

## Silkscreen, mask and mechanical layers (free items; w line width, h text height)
Top Overlay:
  text "+" at 28.25,4.375 h2
  text "-" at 27.925,0.675 h2

## Text inside footprints (layer, text, board x,y; h text height)
IC1: Mechanical 13 "ANTENNA AREA" at 8.715,45.074 h0.25; Mechanical 13 "CUTOUT POLYGON" at 8.715,44.566 h0.25
P11: Top Overlay "6" at 11.635,17.482 h1.27